# Altium PCB powersuppy.PcbDoc (part 2 of 2)
Units mm, origin at the board's own origin, x right, y up, seen from the top; angles counter-clockwise.
Board outline 153.8 x 127.13 mm, 2 copper layers (Top Layer, Bottom Layer); 131 components, 99 nets, 426 pads, 176 vias.
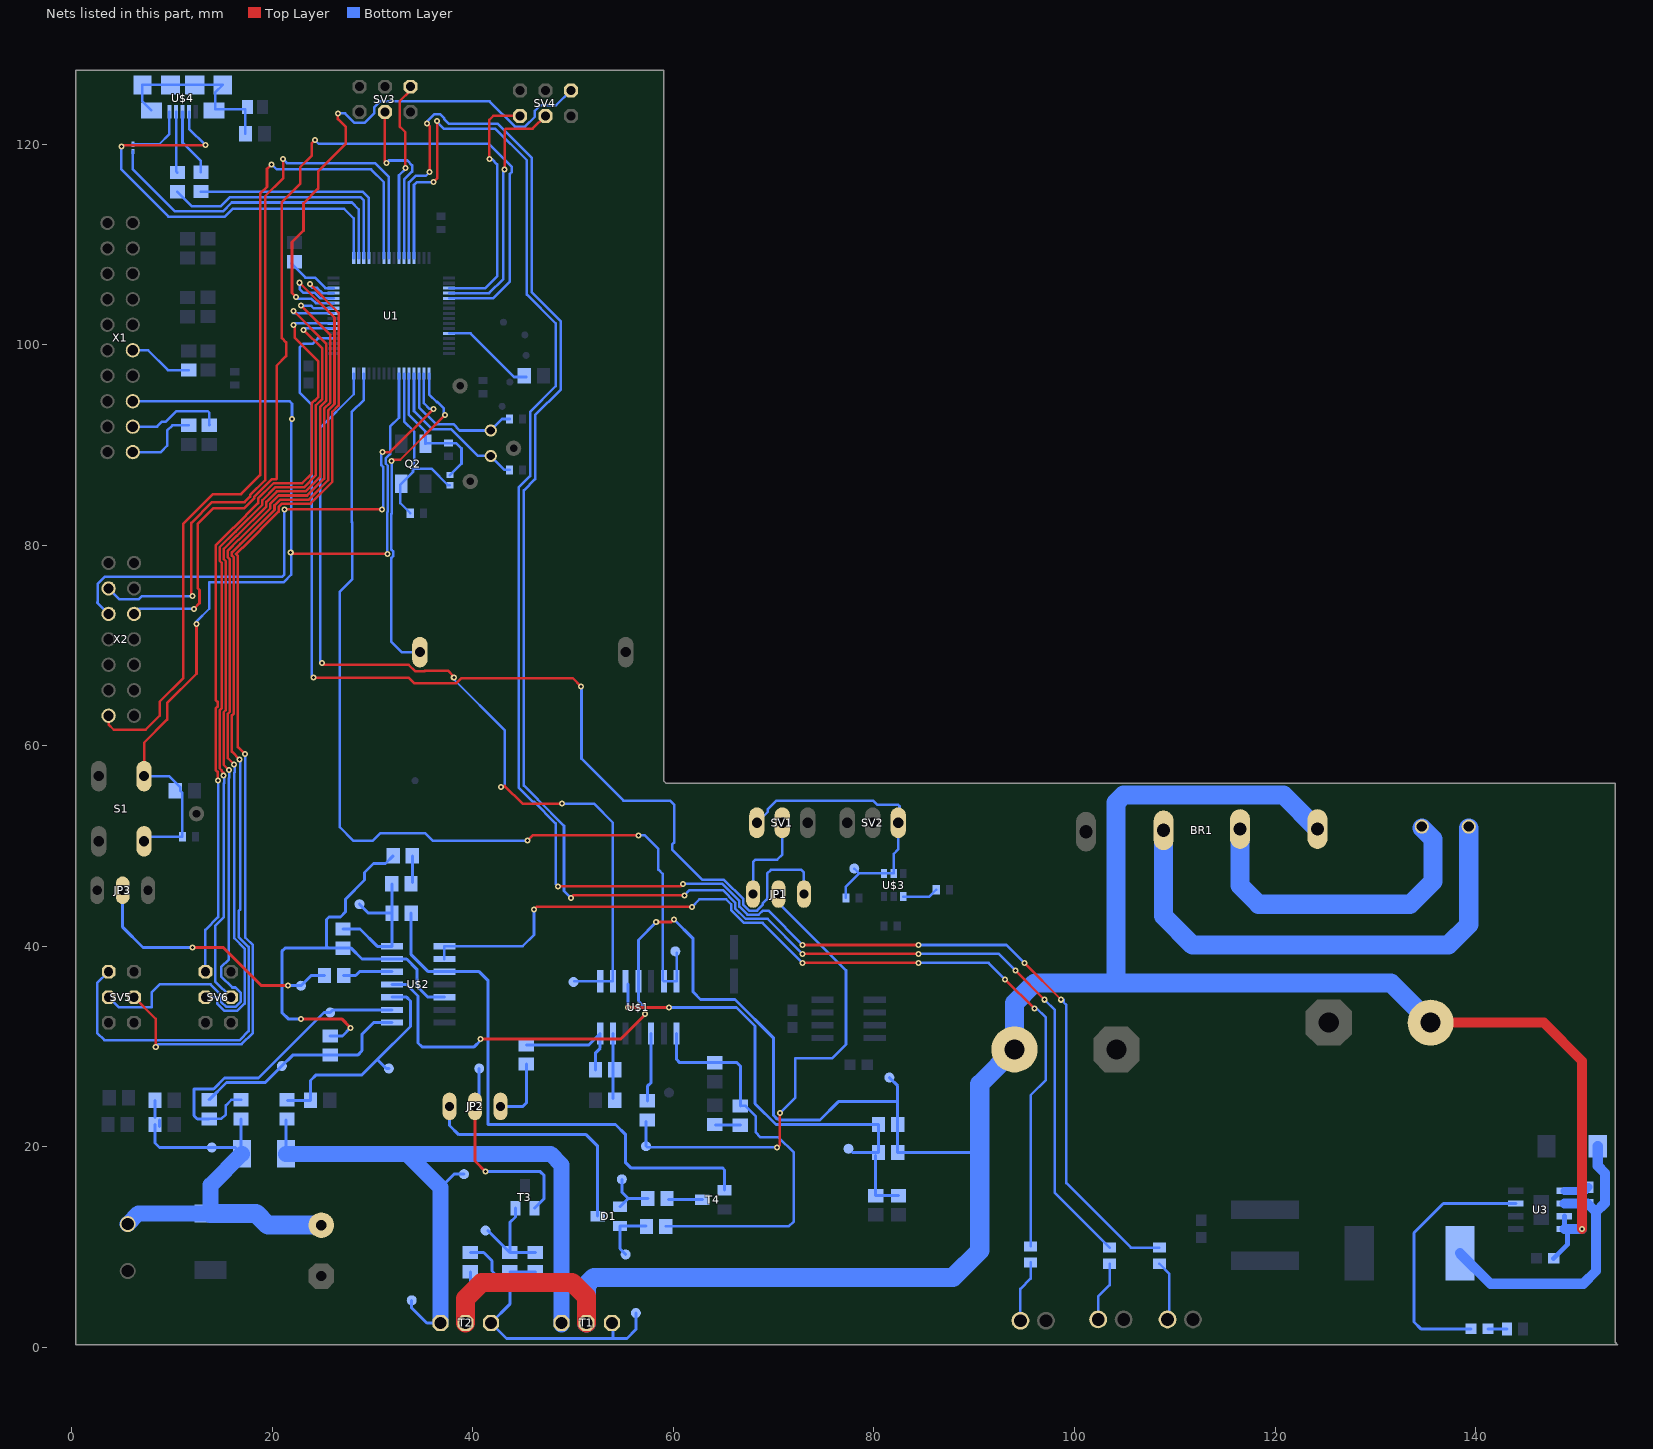
[diagram p2: the nets of this part, all layers, seen from the top]

## Via types
v1: diameter 0.6, hole 0.3, Top Layer to Bottom Layer, 166 vias
v2: diameter 4, hole 2, Top Layer to Bottom Layer, 6 vias
v3: diameter 1.2, hole 0.6, Top Layer to Bottom Layer, 2 vias
v4: diameter 1.27, hole 0.711, Top Layer to Bottom Layer, 1 vias
v5: diameter 0.4, hole 0.3, Top Layer to Bottom Layer, 1 vias

## Nets (pads, with @x,y where several pads share a name; then routed paths per layer and width w, separated by ;. In a path a pad name is that pad's centre, name@x,y a point inside that pad or via, vN(x,y) a via of type N, cw(c..) or ccw(c..) an arc to the next point about the centre after c; other vN are vias at no path point) (continued)
LCD_D7: U1.39 X2.14 | length 87.5
  Top Layer w0.254: X2.14@3.683,62.992 3.683,62.103 4.191,61.595 7.366,61.595 8.763,62.992 8.763,64.389 11.136,66.762 11.136,82.142 14.097,85.103 16.904,85.103 18.796,86.995 18.796,115.062 19.477,115.743 19.477,117.521 v1(19.939,117.983)
  Bottom Layer w0.254: v1(19.939,117.983) 20.447,117.475 29.845,117.475 31.127,116.193 U1.39@31.127,108.636
LCD_EN: U1.2 X2.6 | length 55.6
  Top Layer w0.254: v1(21.209,83.566) v1(30.937,83.566) ; v1(31.018,89.281) 31.75,89.281 v1(36.068,93.599)
  Bottom Layer w0.254: X2.6@3.683,73.152 2.54,74.295 2.591,74.346 2.591,76.144 3.281,76.835 20.955,76.835 21.209,77.089 v1(21.209,83.566) ; v1(30.937,83.566) 31.064,83.693 31.064,87.811 30.891,87.984 30.891,89.154 v1(31.018,89.281) ; U1.2@35.128,97.12 35.128,94.158 35.687,93.599 v1(36.068,93.599)
LCD_RS: U1.40 X2.4 | length 77.6
  Top Layer w0.254: v1(12.065,74.93) 11.944,75.051 11.944,82.232 14.007,84.295 17.239,84.295 17.785,84.841 17.785,84.984 19.304,86.504 19.304,114.808 21.082,116.586 v1(21.082,118.491)
  Bottom Layer w0.254: X2.4@3.683,75.692 4.775,74.6 6.675,74.6 7.006,74.93 v1(12.065,74.93) ; v1(21.082,118.491) 21.463,118.11 30.226,118.11 31.627,116.709 U1.40@31.627,108.636
LCD_RW: U1.53 X2.5 | length 99.5
  Top Layer w0.254: v1(12.192,73.66) 12.746,74.214 12.746,75.519 12.573,75.692 12.573,82.142 14.097,83.666 17.185,83.666 18.191,84.672 18.191,84.816 19.959,86.584 20.417,86.584 20.447,86.614 20.447,97.917 21.382,98.852 21.382,100.231 20.955,100.658 20.955,114.215 22.779,116.039 22.779,117.692 23.922,118.835 23.922,120.061 v1(24.257,120.396)
  Bottom Layer w0.254: X2.5@6.223,73.152 6.731,73.66 v1(12.192,73.66) ; v1(24.257,120.396) 24.638,120.015 41.603,120.015 43.861,117.757 43.861,117.193 43.688,117.02 43.688,106.299 42.012,104.623 U1.53@37.643,104.623
LED_C1: R45.1 U1.45 | length 189.6
  Top Layer w0.254: v1(36.068,116.205) 36.449,116.586 v1(36.449,122.301) ; v1(48.514,45.974) 60.706,45.974 v1(60.96,46.228) ; v1(72.898,40.132) v1(84.455,40.132) ; v1(94.996,38.354) v1(98.679,34.671)
  Bottom Layer w0.254: U1.45@34.138,108.636 34.138,115.926 34.417,116.205 v1(36.068,116.205) ; v1(36.449,122.301) 36.322,122.301 37.084,121.539 42.234,121.539 45.385,118.388 45.385,104.997 48.273,102.108 48.273,95.854 45.71,93.29 45.71,86.888 44.577,85.755 44.577,55.819 45.974,54.422 46.102,54.422 48.26,52.264 48.26,46.228 v1(48.514,45.974) ; v1(60.96,46.228) 64.878,46.228 66.573,44.533 66.573,43.958 67.377,43.155 68.513,43.155 68.92,43.561 69.469,43.561 v1(72.898,40.132) ; v1(84.455,40.132) 93.218,40.132 v1(94.996,38.354) ; v1(98.679,34.671) 98.933,34.671 98.933,34.417 99.187,34.163 99.187,16.383 105.626,9.944 R45.1@108.458,9.944
LED_C2: R46.1 U1.44 | length 186
  Top Layer w0.254: v1(35.433,122.047) 35.687,121.793 v1(35.687,117.221) ; v1(49.784,44.831) 50.038,45.085 v1(61.087,45.085) ; v1(72.898,39.243) v1(84.455,39.243) ; v1(94.107,37.592) v1(97.028,34.671)
  Bottom Layer w0.254: U1.44@33.63,108.636 33.63,116.18 34.29,116.84 35.306,116.84 v1(35.687,117.221) ; v1(35.433,122.047) 35.433,122.248 36.167,122.982 36.731,122.982 37.13,122.583 37.13,122.509 37.592,122.047 42.445,122.047 45.893,118.599 45.893,105.207 48.781,102.318 48.781,95.528 46.218,92.964 46.218,86.604 45.085,85.471 45.085,56.029 46.482,54.632 ; 46.482,54.616 49.093,52.005 49.093,45.522 v1(49.784,44.831) ; v1(61.087,45.085) 61.595,45.593 64.938,45.593 66.167,44.364 66.167,43.79 67.209,42.748 69.393,42.748 v1(72.898,39.243) ; v1(84.455,39.243) 92.456,39.243 v1(94.107,37.592) ; v1(97.028,34.671) 98.044,33.655 98.044,15.405 R46.1@103.505,9.944
NetBATERY1_P$2: BATERY1.P$2 U1.1 | length 33.7
  Top Layer w0.254: v1(31.877,88.392) 31.877,88.519 32.766,88.519 v1(37.211,92.964)
  Bottom Layer w0.254: v1(31.877,88.392) 31.923,88.346 31.923,83.158 31.877,83.112 31.877,79.559 32.05,79.386 32.05,78.906 31.877,78.733 31.877,70.358 32.893,69.342 BATERY1.P$2@34.722,69.342 ; U1.1@35.636,97.12 35.636,95.047 36.403,94.28 36.477,94.28 37.084,93.673 37.084,92.964 v1(37.211,92.964)
NetBR1_AC1: BR1.AC1 CON_LIN_IN1.1 | length 32.4
  Bottom Layer w1.9: BR1.AC1@116.514,51.689 116.514,46.046 118.364,44.196 133.477,44.196 135.763,46.482 135.763,50.693 CON_LIN_IN1.1@134.64,51.816
NetBR1_AC2: BR1.AC2 CON_LIN_IN1.2 | length 50.7
  Bottom Layer w1.9: BR1.AC2@108.89,51.562 108.89,43.002 111.76,40.132 137.287,40.132 139.319,42.164 CON_LIN_IN1.2@139.319,51.816
NetC3_+: C3.+ CON_LIN_OUT1.1 R1.2 R2.2 R4.2 R11.2 R12.2 TP3.TP | length 44.1
  Bottom Layer w0.3: R12.2@8.306,22.225 8.306,20.396 8.763,19.939 TP3.TP@13.97,19.939 16.332,19.939 R1.2@16.891,19.38 ; R12.2@8.306,22.908 R11.2@8.306,24.638 ; R12.2@8.735,22.048 R12.2@8.735,22.657 ; R4.2@16.891,22.784 R1.2@16.891,19.38 ; R1.2@16.967,19.304 R1.2@16.891,19.38
  Bottom Layer w1.6: CON_LIN_OUT1.1@5.588,12.299 6.649,13.36 R2.2@13.843,13.36 13.843,16.18 R1.2@16.967,19.304
  Bottom Layer w1.905: R2.2@13.843,13.36 18.39,13.36 19.558,12.192 C3.+@24.892,12.192
NetC4_1: C4.1 R13.1 | length 2.5
  Bottom Layer w0.3: C4.1@64.194,22.164 R13.1@66.675,22.164
NetC5_1: C5.1 R24.1 | length 2.7
  Bottom Layer w0.3: R24.1@33.97,46.355 C5.1@33.97,49.022
NetC5_2: C5.2 R22.1 R26.2 U$2.6 U$2.12 | length 48.7
  Top Layer w0.3: v1(22.86,32.766) 26.924,32.766 v1(27.813,31.877)
  Bottom Layer w0.3: v1(22.86,32.766) 21.59,32.766 20.955,33.401 20.955,39.497 21.275,39.817 25.588,39.817 ; R26.2@25.781,31.064 27,31.064 v1(27.813,31.877) ; C5.2@32.055,49.022 31.293,48.26 30.099,48.26 29.21,47.371 29.21,46.609 27.305,44.704 27.305,43.434 26.797,42.926 25.654,42.926 25.4,42.672 25.4,40.005 25.588,39.817 ; U$2.12@37.16,34.925 35.538,34.925 34.417,36.046 34.417,37.719 33.401,38.735 U$2.6@31.944,38.735 28.956,38.735 27.874,39.817 R22.1@27.051,39.817 25.588,39.817
NetC6_1: C6.1 U$3.1 | length 3.6
  Bottom Layer w0.254: U$3.1@82.928,44.951 85.525,44.951 C6.1@86.218,45.644
NetC9_2: C9.2 Q1.2 U1.3 | length 13.8
  Bottom Layer w0.254: U1.3@34.646,97.12 34.646,93.751 36.322,92.075 38.056,92.075 38.691,91.44 Q1.2@41.783,91.44 42.926,92.583 C9.2@43.663,92.583
NetC10_2: C10.2 Q1.1 U1.4 | length 15.7
  Bottom Layer w0.254: U1.4@34.138,97.12 34.138,93.37 35.941,91.567 37.846,91.567 40.513,88.9 Q1.1@41.783,88.9 43.18,87.503 C10.2@43.663,87.503
NetC12_1: C12.1 Q2.P$1 R31.2 U1.6 | length 19.5
  Bottom Layer w0.254: U1.6@33.147,97.12 33.147,92.329 34.163,91.313 34.163,87.757 ; C12.1@33.767,83.185 32.766,84.186 32.766,86.03 Q2.P$1@32.868,86.131 34.036,87.3 34.036,87.63 35.877,87.63 37.528,85.979 R31.2@37.719,85.979
NetC13_1: C13.1 Q2.P$3 R31.1 U1.5 | length 14.6
  Bottom Layer w0.254: U1.5@33.63,97.12 33.63,92.989 35.281,91.338 Q2.P$3@35.281,90.119 ; Q2.P$3@35.346,90.185 C13.1@37.592,90.185 38.339,90.185 38.87,89.654 38.87,88.138 R31.1@37.719,86.987
NetC14_1: C14.1 R40.2 U$4.PAD1 U$4.PAD2 U$4.PAD3 U$4.PAD4 U$4.PAD5 U$4.PAD6 | length 19.1
  Bottom Layer w0.254: U$4.PAD1@7.949,123.355 7.049,124.255 U$4.PAD3@7.049,125.905 U$4.PAD4@9.849,125.905 U$4.PAD5@12.268,125.905 U$4.PAD6@15.062,125.905 14.301,125.144 14.301,123.483 17.323,123.483 R40.2@17.323,121.031
NetC24_1: C24.1 U3.3 | length 26.2
  Bottom Layer w0.3: C24.1@139.536,1.859 134.539,1.859 133.858,2.54 133.858,11.43 136.778,14.35 U3.3@144.018,14.35
NetC24_2: C24.2 R48.2 | length 1.9
  Bottom Layer w0.3: C24.2@141.249,1.859 R48.2@143.142,1.859
NetC25_1: C25.1 D5.C L2.1 U3.6 | length 32
  Bottom Layer w1: L2.1@138.43,9.398 141.478,6.35 150.749,6.35 152.019,7.62 152.019,13.501 ; U3.6@148.844,14.35 151.17,14.35 C25.1@151.257,14.263 152.019,13.501 ; D5.C@152.182,20.066 152.182,18.107 152.891,17.399 152.891,14.373 152.019,13.501
NetC25_2: C25.2 U3.5 | length 2.6
  Bottom Layer w0.8: U3.5@148.844,15.62 150.901,15.62 C25.2@151.257,15.977
NetC100_1: C100.1 U1.30 | length 5.2
  Bottom Layer w0.254: C100.1@21.905,108.077 23.302,106.68 24.257,106.68 25.298,105.639 U1.30@26.127,105.639
NetD1_1: D1.1 R23.2 TP15.TP | length 5.3
  Bottom Layer w0.3: D1.1@54.669,14.031 55.497,14.859 ; TP15.TP@54.864,16.764 54.864,15.492 55.497,14.859 ; R23.2@57.455,14.859 55.497,14.859
NetD1_2: D1.2 R16.2 TP11.TP | length 5.7
  Bottom Layer w0.3: TP11.TP@55.245,9.271 54.669,9.847 D1.2@54.669,12.116 R16.2@57.277,12.116
NetD1_3: D1.3 JP2.1 | length 24.5
  Bottom Layer w0.3: JP2.1@37.682,24.036 37.682,22.135 38.608,21.209 51.308,21.209 52.451,20.066 D1.3@52.451,13.081
NetD2_1: D2.1 R45.2 | length 5.6
  Bottom Layer w0.254: R45.2@108.458,8.344 109.474,7.328 D2.1@109.474,3.175
NetD3_1: D3.1 R46.2 | length 6
  Bottom Layer w0.254: D3.1@102.362,2.794 102.362,5.08 103.505,6.223 R46.2@103.505,8.344
NetD4_1: D4.1 R47.2 | length 6.2
  Bottom Layer w0.254: D4.1@94.615,2.667 94.615,5.842 95.631,6.858 R47.2@95.631,8.471
NetJP1_2: JP1.2 R19.1 TP13.TP | length 48.6
  Top Layer w0.254: v1(70.358,19.939) 70.612,20.193 v1(70.612,23.368)
  Bottom Layer w0.254: TP13.TP@57.404,19.939 v1(70.358,19.939) ; v1@70.485,23.368 v1(70.612,23.368) 72.136,24.892 72.136,28.829 75.819,28.829 77.216,30.226 77.216,37.592 70.485,44.323 JP1.2@70.485,45.212
  Bottom Layer w0.3: TP13.TP@57.277,20.066 R19.1@57.277,22.545
NetJP2_2: JP2.2 T3.B TP_T1.TP | length 20.6
  Top Layer w0.3: JP2.2@40.222,24.036 40.222,18.579 v1(41.275,17.526)
  Bottom Layer w0.3: JP2.2@40.222,24.036 40.64,24.454 TP_T1.TP@40.64,27.813 ; v1(41.275,17.526) 46.736,17.526 47.117,17.145 47.117,14.841 T3.B@46.162,13.886
NetJP2_3: JP2.3 R25.1 | length 6.6
  Bottom Layer w0.3: JP2.3@42.762,24.036 44.991,24.036 45.339,24.384 R25.1@45.339,28.26
NetJP3_2: JP3.2 R28.1 TP18.TP | length 27
  Top Layer w0.254: JP3.2@5.334,45.593 JP3.2@5.588,45.339
  Top Layer w0.3: v1(12.065,39.878) 15.113,39.878 18.923,36.068 v1(21.59,36.068)
  Bottom Layer w0.3: JP3.2@5.08,45.593 5.08,41.91 7.112,39.878 v1(12.065,39.878) ; v1(21.59,36.068) TP18.TP@22.86,36.068 23.876,37.084 R28.1@25.212,37.084
NetL1_1: L1.1 U$4.V | length 6.3
  Bottom Layer w0.254: L1.1@6.096,119.984 8.732,119.984 9.749,121.001 U$4.V@9.749,123.235
NetR1_1: R1.1 R3.2 T1.P$3 T2.P$3 TP1.TP TP2.TP | length 72.6
  Bottom Layer w0.3: R1.1@21.377,19.304 R3.2@21.377,22.698 ; TP2.TP@33.909,4.699 33.909,3.937 35.408,2.438 T2.P$3@36.779,2.438 ; 36.779,15.926 38.125,17.272 TP1.TP@39.116,17.272
  Bottom Layer w1.6: R1.1@21.377,19.304 33.401,19.304 ; T2.P$3@36.779,2.438 36.779,15.926 33.401,19.304 ; T1.P$3@48.844,2.311 48.844,18.212 47.752,19.304 33.401,19.304
NetR3_1: R3.1 R5.1 TP6.TP U$2.3 | length 22.5
  Bottom Layer w0.3: R3.1@21.524,24.638 R5.1@23.815,24.638 23.815,26.609 24.384,27.178 28.956,27.178 30.48,28.702 ; TP6.TP@31.623,27.813 31.369,27.813 30.48,28.702 ; U$2.3@31.944,34.925 33.401,34.925 33.782,34.544 33.782,32.004 30.48,28.702
NetR4_1: R4.1 R10.2 TP5.TP U$2.2 | length 31.8
  Bottom Layer w0.254: R10.2@13.716,22.784 14.91,22.784 15.367,23.241 15.367,24.13 15.936,24.699 R4.1@16.891,24.699
  Bottom Layer w0.3: R10.2@13.716,22.784 12.522,22.784 12.192,23.114 12.192,25.781 14.158,25.781 15.246,26.868 18.622,26.868 25.154,33.401 TP5.TP@25.781,33.401 26.035,33.655 U$2.2@31.944,33.655
NetR6_1: R6.1 R14.2 R15.2 T1.P$1 T2.P$1 TP7.TP | length 32.2
  Bottom Layer w0.3: R6.1@39.751,9.459 41.087,9.459 41.91,8.636 41.91,7.62 42.418,7.112 43.688,7.112 43.688,4.318 41.813,2.443 T2.P$1@41.813,2.438 43.362,0.889 53.975,0.889 ; R15.2@43.688,7.544 R14.2@46.228,7.544 ; T1.P$1@53.878,2.438 53.975,2.341 53.975,0.889 ; TP7.TP@56.261,3.429 56.261,1.778 55.372,0.889 53.975,0.889
NetR7_1: R7.1 R8.1 R17.2 R18.2 TP9.TP U$1.3 | length 48.5
  Top Layer w0.3: v1(55.499,33.909) v1(59.563,33.909)
  Bottom Layer w0.3: v1(55.499,33.909) U$1.3@55.499,36.255 ; v1@59.436,33.909 v1(59.563,33.909) 66.294,33.909 68.146,32.057 68.146,24.31 70.231,22.225 R7.1@80.457,22.225 R8.1@80.457,19.431 77.851,19.431 ; R8.1@80.182,19.156 R18.2@80.182,15.135 R17.2@82.461,15.135
NetR9_2: R9.2 R13.2 R16.1 U$1.8 | length 41.2
  Bottom Layer w0.254: R16.1@59.243,12.065 71.501,12.065 72.009,12.573 72.009,19.431 70.485,20.955 68.707,20.955 68.199,21.463 68.199,23.075 67.195,24.079 R13.2@66.675,24.079
  Bottom Layer w0.3: U$1.8@60.325,31.293 60.325,28.702 60.63,28.397 R9.2@64.135,28.397 66.345,28.397 66.675,28.067 R13.2@66.675,24.079
NetR10_1: R10.1 R26.1 TP14.TP U$2.1 | length 22.4
  Bottom Layer w0.3: R10.1@13.716,24.699 15.433,26.416 19.304,26.416 TP14.TP@20.955,28.067 22.037,29.149 R26.1@25.781,29.149 28.514,29.149 28.956,29.591 28.956,31.242 30.099,32.385 U$2.1@31.944,32.385
NetR14_1: R14.1 R15.1 T3.E TP12.TP | length 10.3
  Bottom Layer w0.3: TP12.TP@41.496,11.651 R15.1@43.688,9.459 ; T3.E@44.247,13.886 44.247,13.005 43.688,12.446 R15.1@43.688,9.459 ; R14.1@46.228,9.459 R15.1@43.688,9.459
NetR19_2: R19.2 U$1.10 | length 6.9
  Bottom Layer w0.3: R19.2@57.404,24.587 57.404,26.035 57.785,26.416 U$1.10@57.785,31.293
NetR22_2: R22.2 R24.2 R27.1 TP16.TP U$2.7 | length 15.4
  Bottom Layer w0.3: R22.2@27.051,41.732 28.753,41.732 30.48,40.005 U$2.7@31.944,40.005 R27.1@31.943,43.307 ; TP16.TP@28.702,44.196 29.591,43.307 R27.1@31.943,43.307 R24.2@31.943,46.213
NetR23_1: R23.1 T4.C | length 3.4
  Bottom Layer w0.3: R23.1@59.497,14.732 T4.C@62.89,14.732
NetR25_2: R25.2 R29.2 U$1.14 | length 11.6
  Bottom Layer w0.3: R25.2@45.339,30.175 51.587,30.175 U$1.14@52.705,31.293 52.705,29.845 52.248,29.388 R29.2@52.248,27.686
NetR27_2: R27.2 T4.B U$2.10 | length 56.3
  Bottom Layer w0.3: R27.2@33.858,43.307 33.858,39.167 35.56,37.465 U$2.10@37.16,37.465 40.64,37.465 41.529,36.576 41.529,22.225 54.229,22.225 55.245,21.209 55.245,18.415 55.753,17.907 64.897,17.907 65.108,17.696 T4.B@65.108,15.682
NetR28_2: R28.2 U$2.5 | length 5
  Bottom Layer w0.3: R28.2@27.127,37.084 28.321,37.084 28.702,37.465 U$2.5@31.944,37.465
NetR29_1: R29.1 R30.1 U$1.13 | length 6.5
  Bottom Layer w0.3: R30.1@53.975,24.826 U$1.13@53.975,31.293
NetR32_1: R32.1 U$4.D- | length 6.1
  Bottom Layer w0.254: U$4.D-@10.409,123.235 10.409,117.287 R32.1@10.541,117.155
NetR34_1: R34.1 U$4.D+ | length 6.8
  Bottom Layer w0.254: U$4.D+@11.049,123.235 11.049,120.142 12.89,118.301 R34.1@12.89,117.18
NetR37_2: R37.2 U1.60 | length 9.5
  Bottom Layer w0.254: U1.60@37.643,101.12 39.777,101.12 44.123,96.774 R37.2@45.317,96.774
NetR39_2: R39.2 X1.11 | length 6.4
  Bottom Layer w0.254: X1.11@6.096,99.441 7.62,99.441 9.601,97.46 R39.2@11.684,97.46
NetR43_2: R43.2 X1.17 | length 9.6
  Bottom Layer w0.254: X1.17@6.096,91.821 8.509,91.821 9.017,92.329 9.398,92.329 10.414,93.345 13.589,93.345 13.716,93.218 R43.2@13.716,91.958 R43.2@13.76,92.002
NetR44_2: R44.2 X1.19 | length 7.6
  Bottom Layer w0.254: X1.19@6.096,89.281 8.89,89.281 9.525,89.916 9.525,91.44 10.043,91.958 R44.2@11.684,91.958
NetR47_1: R47.1 U$2.8 U$2.9 | length 93.5
  Top Layer w0.254: v1(46.101,43.688) 46.355,43.942 v1(61.849,43.942) ; v1(72.898,38.354) v1(84.455,38.354) ; v1(93.091,36.703) v1(96.012,33.782)
  Bottom Layer w0.254: U$2.9@37.16,38.735 U$2.8@37.16,40.005 44.958,40.005 46.101,41.148 v1(46.101,43.688) ; v1(61.849,43.942) 62.598,44.691 65.265,44.691 65.761,44.196 65.761,43.621 67.04,42.342 68.91,42.342 v1(72.898,38.354) ; v1(84.455,38.354) 91.44,38.354 v1(93.091,36.703) ; R47.1@95.631,10.071 95.631,25.146 97.155,26.67 97.155,32.893 96.139,33.909 v1(96.012,33.782)
Push1: SV5.4 U1.25 | length 99.1
  Top Layer w0.254: v1(15.676,57.586) 15.164,58.098 15.164,63.36 15.362,63.558 15.362,78.418 15.164,78.616 15.164,79.626 16.488,80.95 16.507,80.95 19.41,83.853 19.41,84.311 20.464,85.365 23.314,85.365 24.765,86.816 24.765,93.789 25.395,94.419 25.395,100.081 v1(22.098,103.378)
  Bottom Layer w0.254: SV5.4@3.683,34.925 4.699,33.909 8.001,33.909 8.001,35.433 8.763,36.195 13.843,36.195 14.91,35.128 14.91,34.466 15.416,33.96 16.334,33.96 16.84,34.466 16.84,35.384 16.334,35.89 16.026,35.89 14.91,37.006 14.91,37.924 15.676,38.69 15.676,56.767 15.723,56.814 15.723,57.539 v1(15.676,57.586) ; v1(22.098,103.378) 22.098,103.124 U1.25@26.127,103.124
Push2: SV6.4 U1.26 | length 86.1
  Top Layer w0.254: v1(16.208,58.118) 15.57,58.756 15.57,63.192 15.769,63.39 15.769,78.586 15.57,78.784 15.57,79.458 16.656,80.543 16.675,80.543 19.817,83.685 19.817,84.143 20.632,84.958 23.482,84.958 25.171,86.647 25.171,93.621 25.802,94.251 25.802,100.944 v1(22.86,103.886)
  Bottom Layer w0.254: SV6.4@13.335,34.925 14.451,34.925 14.503,34.873 14.503,34.298 15.248,33.553 16.502,33.553 17.247,34.298 17.247,39.776 16.208,40.815 16.208,57.299 16.255,57.346 16.255,58.071 v1(16.208,58.118) ; v1(22.86,103.886) 23.876,103.886 24.13,103.632 U1.26@26.127,103.632
RESET: C17.1 R42.2 S1.3 S1.4 U1.7 X1.15 | length 105.1
  Top Layer w0.254: S1.3@7.214,56.972 7.214,60.3 9.525,62.611 9.525,64.262 12.446,67.183 v1(12.446,72.136) ; v1(21.844,79.248) 21.946,79.146 v1(31.471,79.146) ; v1@21.844,92.583 v1(21.971,92.583)
  Bottom Layer w0.254: X1.15@6.096,94.361 21.717,94.361 21.971,94.107 v1(21.971,92.583) 21.89,92.502 21.89,77.052 21.165,76.327 13.716,76.327 13.716,73.66 12.446,72.39 v1(12.446,72.136) ; S1.4@7.214,50.47 7.671,50.927 C17.1@11.034,50.927 11.034,55.311 10.846,55.499 10.846,55.829 9.703,56.972 S1.3@7.214,56.972 ; v1(31.471,79.146) 31.471,83.28 31.517,83.326 31.517,87.933 31.298,88.152 31.298,88.632 31.75,89.084 31.75,91.821 32.639,92.71 U1.7@32.639,97.12
SPI_MISO: SV4.3 U1.52 | length 25.6
  Top Layer w0.254: v1(43.18,117.475) 43.18,121.412 43.307,121.539 45.974,121.539 SV4.3@47.244,122.809
  Bottom Layer w0.254: U1.52@37.643,105.131 41.631,105.131 43.053,106.553 43.053,117.475 v1(43.18,117.475)
SPI_MOSI: SV4.2 U1.27 | length 52.8
  Top Layer w0.254: v1(22.352,104.775) 21.971,105.156 21.971,110.236 23.114,111.379 23.114,114.09 24.576,115.551 24.576,117.283 27.351,120.059 27.351,121.694 26.543,122.502 v1(26.543,123.063)
  Bottom Layer w0.254: v1(22.352,104.775) 22.555,104.572 23.909,104.572 24.34,104.14 U1.27@26.127,104.14 ; v1(26.543,123.063) 27.261,123.063 28.201,122.123 29.203,122.123 30.175,123.096 30.175,123.691 30.741,124.257 41.672,124.257 44.186,121.742 45.205,121.742 46.177,122.715 46.177,123.31 46.743,123.876 48.311,123.876 SV4.2@49.784,125.349
SPI_SCK: SV4.5 U1.51 | length 24.6
  Top Layer w0.254: v1(41.656,118.491) 41.656,122.428 42.037,122.809 SV4.5@44.704,122.809
  Bottom Layer w0.254: U1.51@37.643,105.639 41.25,105.639 42.418,106.807 42.418,117.983 41.91,118.491 v1(41.656,118.491)
TIM2_CH3: SV5.2 U1.28 | length 109.7
  Top Layer w0.254: v1(16.74,58.65) 15.977,59.413 15.977,63.023 16.175,63.222 16.175,78.754 15.977,78.953 15.977,79.289 16.824,80.137 16.844,80.137 20.223,83.517 20.223,83.974 20.801,84.552 23.651,84.552 25.578,86.479 25.578,93.452 26.208,94.083 26.208,102.697 v1(22.733,106.172)
  Bottom Layer w0.254: SV5.2@3.683,37.465 2.54,36.322 2.54,31.369 3.266,30.643 16.764,30.643 17.653,31.532 17.653,39.945 16.651,40.946 16.651,43.515 16.787,43.651 16.787,58.603 v1(16.74,58.65) ; v1(22.733,106.172) 22.733,105.537 23.114,105.156 24.257,105.156 24.79,104.623 U1.28@26.127,104.623
TIM2_CH4: SV5.3 U1.29 | length 101.4
  Top Layer w0.254: SV5.3@6.223,34.925 8.382,32.766 v1(8.382,29.972) ; v1(17.272,59.182) 16.581,59.873 16.581,78.923 16.383,79.121 16.993,79.731 17.012,79.731 20.63,83.348 20.63,83.806 20.969,84.145 23.819,84.145 25.984,86.311 25.984,93.284 26.614,93.914 26.614,103.18 v1(23.749,106.045)
  Bottom Layer w0.254: v1(8.382,29.972) 8.647,30.237 16.932,30.237 18.059,31.364 18.059,40.113 17.319,40.853 17.319,59.135 v1(17.272,59.182) ; v1(23.749,106.045) 23.749,105.918 24.003,105.664 24.467,105.664 25.001,105.131 U1.29@26.127,105.131
TIM3_CH1: SV6.3 U1.22 | length 77.7
  Top Layer w0.254: v1(15.144,57.054) 15.144,57.299 14.956,57.487 14.956,57.558 14.757,57.757 14.757,63.528 14.956,63.727 14.956,78.249 14.757,78.448 14.757,79.794 16.319,81.356 16.339,81.356 19.004,84.022 19.004,84.479 20.296,85.771 23.146,85.771 24.359,86.984 24.359,93.957 24.989,94.588 24.989,99.598 v1(23.114,101.473)
  Bottom Layer w0.254: v1(15.144,57.054) 15.191,57.007 15.191,56.282 15.144,56.235 15.144,42.876 14.3,42.033 14.3,36.5 SV6.3@15.875,34.925 ; v1(23.114,101.473) 23.261,101.62 U1.22@26.127,101.62
TIM3_CH2: SV6.2 U1.23 | length 76.4
  Top Layer w0.254: v1(14.612,56.522) 14.549,56.584 14.549,57.39 14.351,57.588 14.351,60.325 14.351,63.697 14.549,63.895 14.549,64.375 14.351,64.573 14.351,79.963 16.151,81.763 16.17,81.763 18.598,84.19 18.598,84.648 20.127,86.177 22.977,86.177 23.952,87.152 23.952,94.179 24.19,94.417 24.243,94.417 24.582,94.756 24.582,98.354 22.225,100.711 22.225,101.854 v1(22.098,101.981)
  Bottom Layer w0.254: SV6.2@13.335,37.465 13.335,41.642 14.612,42.919 v1(14.612,56.522) ; v1(22.098,101.981) 22.237,102.12 U1.23@26.127,102.12
USART_RX: SV3.3 U1.43 | length 17.6
  Top Layer w0.254: SV3.3@31.242,123.19 31.2,123.148 31.2,118.279 v1(31.369,118.11)
  Bottom Layer w0.254: v1(31.369,118.11) 31.623,118.364 33.475,118.364 33.955,117.884 33.955,117.267 33.147,116.459 U1.43@33.147,108.636
USART_TX: SV3.2 U1.42 | length 17.6
  Top Layer w0.254: 32.715,121.742 32.715,124.282 SV3.2@33.782,125.349 ; 32.766,121.691 33.274,121.183 v1(33.274,117.602)
  Bottom Layer w0.254: U1.42@32.639,108.636 32.639,116.893 33.274,117.528 v1(33.274,117.602)
USB_OTG_HS_DM: R32.2 U1.35 | length 25.4
  Bottom Layer w0.254: R32.2@10.541,115.24 11.989,113.792 14.859,113.792 15.748,114.681 28.829,114.681 29.127,114.383 U1.35@29.127,108.636
USB_OTG_HS_DP: R34.2 U1.36 | length 23
  Bottom Layer w0.254: R34.2@12.89,115.265 29.007,115.265 29.627,114.645 U1.36@29.627,108.636
USB_OTG_HS_ID: U1.33 U$4.ID | length 44.5
  Top Layer w0.254: v1(4.953,119.761) 5.08,119.888 v1(13.335,119.888)
  Bottom Layer w0.254: v1(4.953,119.761) 4.953,117.475 9.652,112.776 15.28,112.776 16.042,113.538 27.178,113.538 28.127,112.589 U1.33@28.127,108.636 ; U$4.ID@11.709,123.235 11.709,121.514 v1(13.335,119.888)
USB_OTG_HS_VBUS: L1.2 U1.34 | length 31.6
  Bottom Layer w0.254: L1.2@6.096,119.284 6.096,117.475 10.287,113.284 15.069,113.284 15.958,114.173 27.94,114.173 28.627,113.486 U1.34@28.627,108.636
V+: BR1.+ C1.+ C2.+ C22.1 R6.2 R7.2 R8.2 T1.P$2 T2.P$2 TP_VLIN1.TP U3.7 U3.8 U$1.4 U$2.4 | length 317
  Top Layer w0.3: v1(40.767,30.734) 54.737,30.734 57.15,33.147 v1(57.15,33.274) ; v1(58.293,42.418) 59.817,42.418 v1(60.071,42.672)
  Top Layer w1: C1.+@135.522,32.385 146.812,32.385 150.621,28.576 v1(150.621,11.81)
  Top Layer w1.905: T2.P$2@39.268,2.438 39.268,4.851 40.894,6.477 49.911,6.477 51.333,5.055 T1.P$2@51.333,2.438
  Bottom Layer w0.3: U$2.4@31.944,36.195 33.401,36.195 34.544,35.052 34.544,30.353 34.925,29.972 40.132,29.972 40.767,30.607 v1(40.767,30.734) ; T2.P$2@39.268,2.438 39.751,2.921 R6.2@39.751,7.544 ; v1(57.15,33.274) 57.15,33.909 56.515,34.544 U$1.4@56.515,36.509 56.515,40.64 v1(58.293,42.418) ; v1(60.071,42.672) 61.976,40.767 61.976,35.433 62.71,34.699 66.144,34.699 70.01,30.833 70.01,23.118 70.362,22.766 70.524,22.766 70.524,22.694 70.541,22.677 74.62,22.677 76.454,24.511 82.372,24.511 ; TP_VLIN1.TP@81.534,26.924 82.372,26.086 82.372,24.511 ; 90.551,19.431 R8.2@82.372,19.431 R7.2@82.372,22.225 82.372,24.511
  Bottom Layer w0.5: C22.1@147.789,8.89 149.186,10.287 149.186,11.468 U3.8@148.844,11.81 U3.7@148.844,13.08
  Bottom Layer w1: U3.8@148.844,11.81 v1(150.621,11.81)
  Bottom Layer w1.9: C2.+@94.018,29.718 94.018,34.328 95.854,36.164 95.903,36.164 96.061,36.322 131.585,36.322 C1.+@135.522,32.385 ; 104.14,36.576 104.14,54.334 104.902,55.096 120.829,55.096 BR1.+@124.236,51.689
  Bottom Layer w1.905: T1.P$2@51.333,2.438 51.333,6.248 52.07,6.985 87.884,6.985 90.551,9.652 90.551,19.431 90.551,26.251 C2.+@94.018,29.718
VDAC: JP1.3 | length 109.2
  Top Layer w0.254: v1(24.13,66.802) 33.59,66.802 34.17,66.223 38.34,66.223 38.864,66.746 49.967,66.746 v1(50.8,65.913)
  Bottom Layer w0.254: v1(24.13,66.802) 23.922,67.01 23.922,94.036 22.733,95.225 22.733,99.695 23.114,100.076 24.003,100.076 24.547,100.62 26.127,100.62 ; v1(50.8,65.913) 50.838,65.875 50.838,58.713 55.017,54.534 59.673,54.534 60.071,54.136 60.071,50.349 59.873,50.151 59.873,49.671 62.909,46.634 65.047,46.634 66.98,44.701 66.98,44.126 67.545,43.561 68.345,43.561 68.91,44.126 68.91,44.272 69.342,44.704 69.342,47.244 69.723,47.625 72.771,47.625 73.025,47.371 JP1.3@73.025,45.212
VIN: TP8.TP U1.16 U$1.1 U$1.2 | length 89.8
  Top Layer w0.254: v1(24.938,68.245) 24.938,68.153 25.019,68.072 33.613,68.072 34.248,67.437 35.195,67.437 35.241,67.483 37.528,67.483 38.1,66.911 v1(38.1,66.802) ; v1(42.799,55.88) 43.053,55.88 43.18,56.007 44.958,54.229 v1(48.895,54.229)
  Bottom Layer w0.254: v1@24.769,68.414 24.769,91.694 28.127,95.052 U1.16@28.127,97.12 ; v1(38.1,66.802) 38.1,66.631 43.18,61.551 43.18,56.007 43.053,55.88 v1(42.799,55.88) ; v1(48.895,54.229) 52.07,54.229 53.975,52.324 U$1.2@53.975,36.509 U$1.1@52.705,36.509 TP8.TP@50.098,36.509
VMEAS: TP4.TP U1.14 U$1.6 U$1.7 | length 97.5
  Top Layer w0.254: v1(45.466,50.546) 45.974,51.054 v1(56.515,51.054)
  Bottom Layer w0.254: U1.14@29.127,97.12 29.127,94.478 27.919,93.271 27.919,82.316 27.965,82.27 27.965,76.597 26.738,75.37 26.738,51.875 28.067,50.546 30.037,50.546 30.774,51.283 35.251,51.283 35.988,50.546 v1(45.466,50.546) ; v1(56.515,51.054) 57.15,51.054 58.514,49.69 58.514,47.642 58.92,47.235 58.92,36.644 U$1.6@59.055,36.509 U$1.7@60.325,36.509 TP4.TP@60.325,39.37
VPOT: JP1.1 SV1.2 | length 9.6
  Bottom Layer w0.254: JP1.1@67.945,45.212 67.945,48.387 68.199,48.641 70.358,48.641 70.866,49.149 SV1.2@70.866,52.324
VREF: C7.1 SV1.1 SV2.1 TP17.TP U$3.4 U$3.5 | length 29.6
  Bottom Layer w0.254: SV1.1@68.326,52.324 69.418,53.416 69.418,53.686 70.266,54.534 79.908,54.534 80.34,54.102 82.423,54.102 82.55,53.975 82.55,52.451 SV2.1@82.423,52.324 82.423,49.657 81.978,49.212 U$3.5@81.978,47.269 U$3.4@81.013,47.269 78.523,47.269 ; C7.1@77.201,44.831 77.201,45.947 78.523,47.269 ; TP17.TP@78.041,47.752 78.523,47.269
pads on no net: SV5.6 SV6.6 U1.17 U1.20 U1.21 U1.41 U1.54 U1.57 U1.58 U1.59 U1.61 U1.62 U2.4 U3.EXP
copper on no net: | length 50.7
  Bottom Layer w0.254: 32.131,108.636 32.131,117.348 v1(32.258,117.475) ; v5@35.179,104.14 37.643,104.14 ; 37.643,100.12 38.945,100.12 42.926,96.139 42.926,93.853 ; 37.643,100.62 39.515,100.62 43.688,96.447 ; 37.643,101.62 40.166,101.62 42.853,98.933 45.317,98.933 ; 37.643,102.12 39.739,102.12 39.751,102.108 40.567,102.108 41.71,100.965 45.19,100.965 ; 37.643,102.62 42.668,102.62 43.053,102.235
  other v5: 35.052,104.013

## Polygon pours and split planes (outlines as drawn)
DGND on Bottom Layer "DGND_L02_P004" (hatched 45Degree grid 0.508 track 0.203, pour order 4): 59.206,56.326 22.036,56.326 20.955,56.241 20.955,56.007 20.955,27.813 0.508,27.813 0.508,127.211 0.592,127.127 59.086,127.127
AGND on Bottom Layer "AGND_L02_P000" (solid, pour order 0): 154.027,55.899 154.027,24.53 153.773,24.276 87.479,24.276 87.479,0.4 0.865,0.4 0.865,28.34 1.246,27.959 21.312,27.959 21.312,56.153 21.566,56.407 21.693,56.28 60.809,56.28
DGND on Bottom Layer "DGND_L02_P002" (hatched 45Degree grid 0.508 track 0.203, pour order 2): 153.67,24.384 153.797,24.257 153.797,0.254 87.122,0.254 87.122,24.13
DGND on Top Layer "DGND_L01_P010" (hatched 45Degree grid 0.508 track 0.203, pour order 10): 59.026,127.382 0.338,127.382 0.338,27.983 0.508,27.813 1.143,28.448 20.955,28.448 20.955,56.158 21.312,56.515 59.087,56.515
AGND on Top Layer "AGND_L01_P012" (solid, pour order 12): 59.004,56.124 21.198,56.124 21.072,56.25 20.955,56.133 20.955,28.448 1.651,28.448 0.508,27.305 0.508,0.254 87.333,0.254 87.738,0.659 87.738,24.017 153.43,24.017 153.732,24.319 153.732,56.326
DGND on Top Layer "DGND_L01_P014" (hatched 45Degree grid 0.508 track 0.203, pour order 14): 153.67,23.876 87.788,23.876 87.738,23.825 87.939,23.624 87.939,0.635 153.543,0.635 153.67,0.508

## Keep-outs
Keep-Out Layer:
  lines w0.254: 153.67,0.127 153.67,56.388 153.732,56.326 59.206,56.326 59.087,56.445 59.087,126.808 59.086,126.809 59.086,127.322 59.026,127.382 0.338,127.382 0.381,127.338 0.381,0.127 0.508,0.254 153.797,0.254

## Other copper
Top Layer:
  rectangle net AGND: 30.988,55.329 37.084,57.277
Bottom Layer:
  rectangle net DGND: 30.988,55.372 37.127,57.277

## Silkscreen, mask and mechanical layers (free items; w line width, h text height)
Bottom Overlay:
  lines w0.254: 30.734,31.369 ccw(c30.734,31.242) 30.824,31.332 ; 51.853,38.391 ccw(c51.853,38.264) 51.943,38.354
  lines w0.5: 122.174,5.96 123.063,5.96 ; 122.666,5.588 122.666,6.35
  text "BoTi" at 151.892,37.211 h2

## Text inside footprints (layer, text, board x,y; h text height)
JP1: Bottom Overlay "1" at 67.945,47.879 h1.54 r180; Bottom Overlay "2" at 70.485,47.879 h1.54 r180; Bottom Overlay "3" at 73.025,47.879 h1.54 r180
JP2: Bottom Overlay "3" at 42.762,26.703 h1.54 r180; Bottom Overlay "2" at 40.222,26.703 h1.54 r180; Bottom Overlay "1" at 37.682,26.703 h1.54 r180
JP3: Bottom Overlay "3" at 7.62,48.26 h1.54 r180; Bottom Overlay "2" at 5.08,48.26 h1.54 r180; Bottom Overlay "1" at 2.54,48.26 h1.54 r180
S1: Mechanical 16 "4" at 7.747,50.165 h1.97 r90; Mechanical 16 "3" at 7.747,58.293 h1.97 r90; Mechanical 16 "2" at 3.429,50.165 h1.97 r90; Mechanical 16 "1" at 3.302,58.039 h1.97 r90
SV1: Bottom Overlay "1" at 65.786,52.959 h1.97 r180
SV2: Bottom Overlay "1" at 84.963,51.689 h1.97
SV3: Bottom Overlay "6" at 31.623,120.396 h1.97; Bottom Overlay "2" at 36.322,125.095 h1.97; Bottom Overlay "1" at 36.322,122.555 h1.97
SV4: Bottom Overlay "6" at 47.625,120.015 h1.97; Bottom Overlay "2" at 52.324,124.714 h1.97; Bottom Overlay "1" at 52.324,122.174 h1.97
SV5: Bottom Overlay "6" at 9.017,35.306 h1.97 r90; Bottom Overlay "2" at 4.318,40.005 h1.97 r90; Bottom Overlay "1" at 6.858,40.005 h1.97 r90
SV6: Bottom Overlay "6" at 18.669,35.306 h1.97 r90; Bottom Overlay "2" at 13.97,40.005 h1.97 r90; Bottom Overlay "1" at 16.51,40.005 h1.97 r90
U$4: Bottom Overlay "V" at 9.779,122.428 h0.39 r90; Bottom Overlay "D-" at 10.541,122.428 h0.39 r90; Bottom Overlay "D+" at 11.176,122.428 h0.39 r90; Bottom Overlay "ID" at 11.811,122.428 h0.39 r90; Bottom Overlay "GND" at 12.446,122.428 h0.39 r90